# Altium PCB PlacaEj6.PcbDoc
Units mm, origin at the board's own origin, x right, y up, seen from the top; angles counter-clockwise.
Board outline 50 x 50 mm, 2 copper layers (Top Layer, Bottom Layer); 13 components, 17 nets, 72 pads, 14 vias.
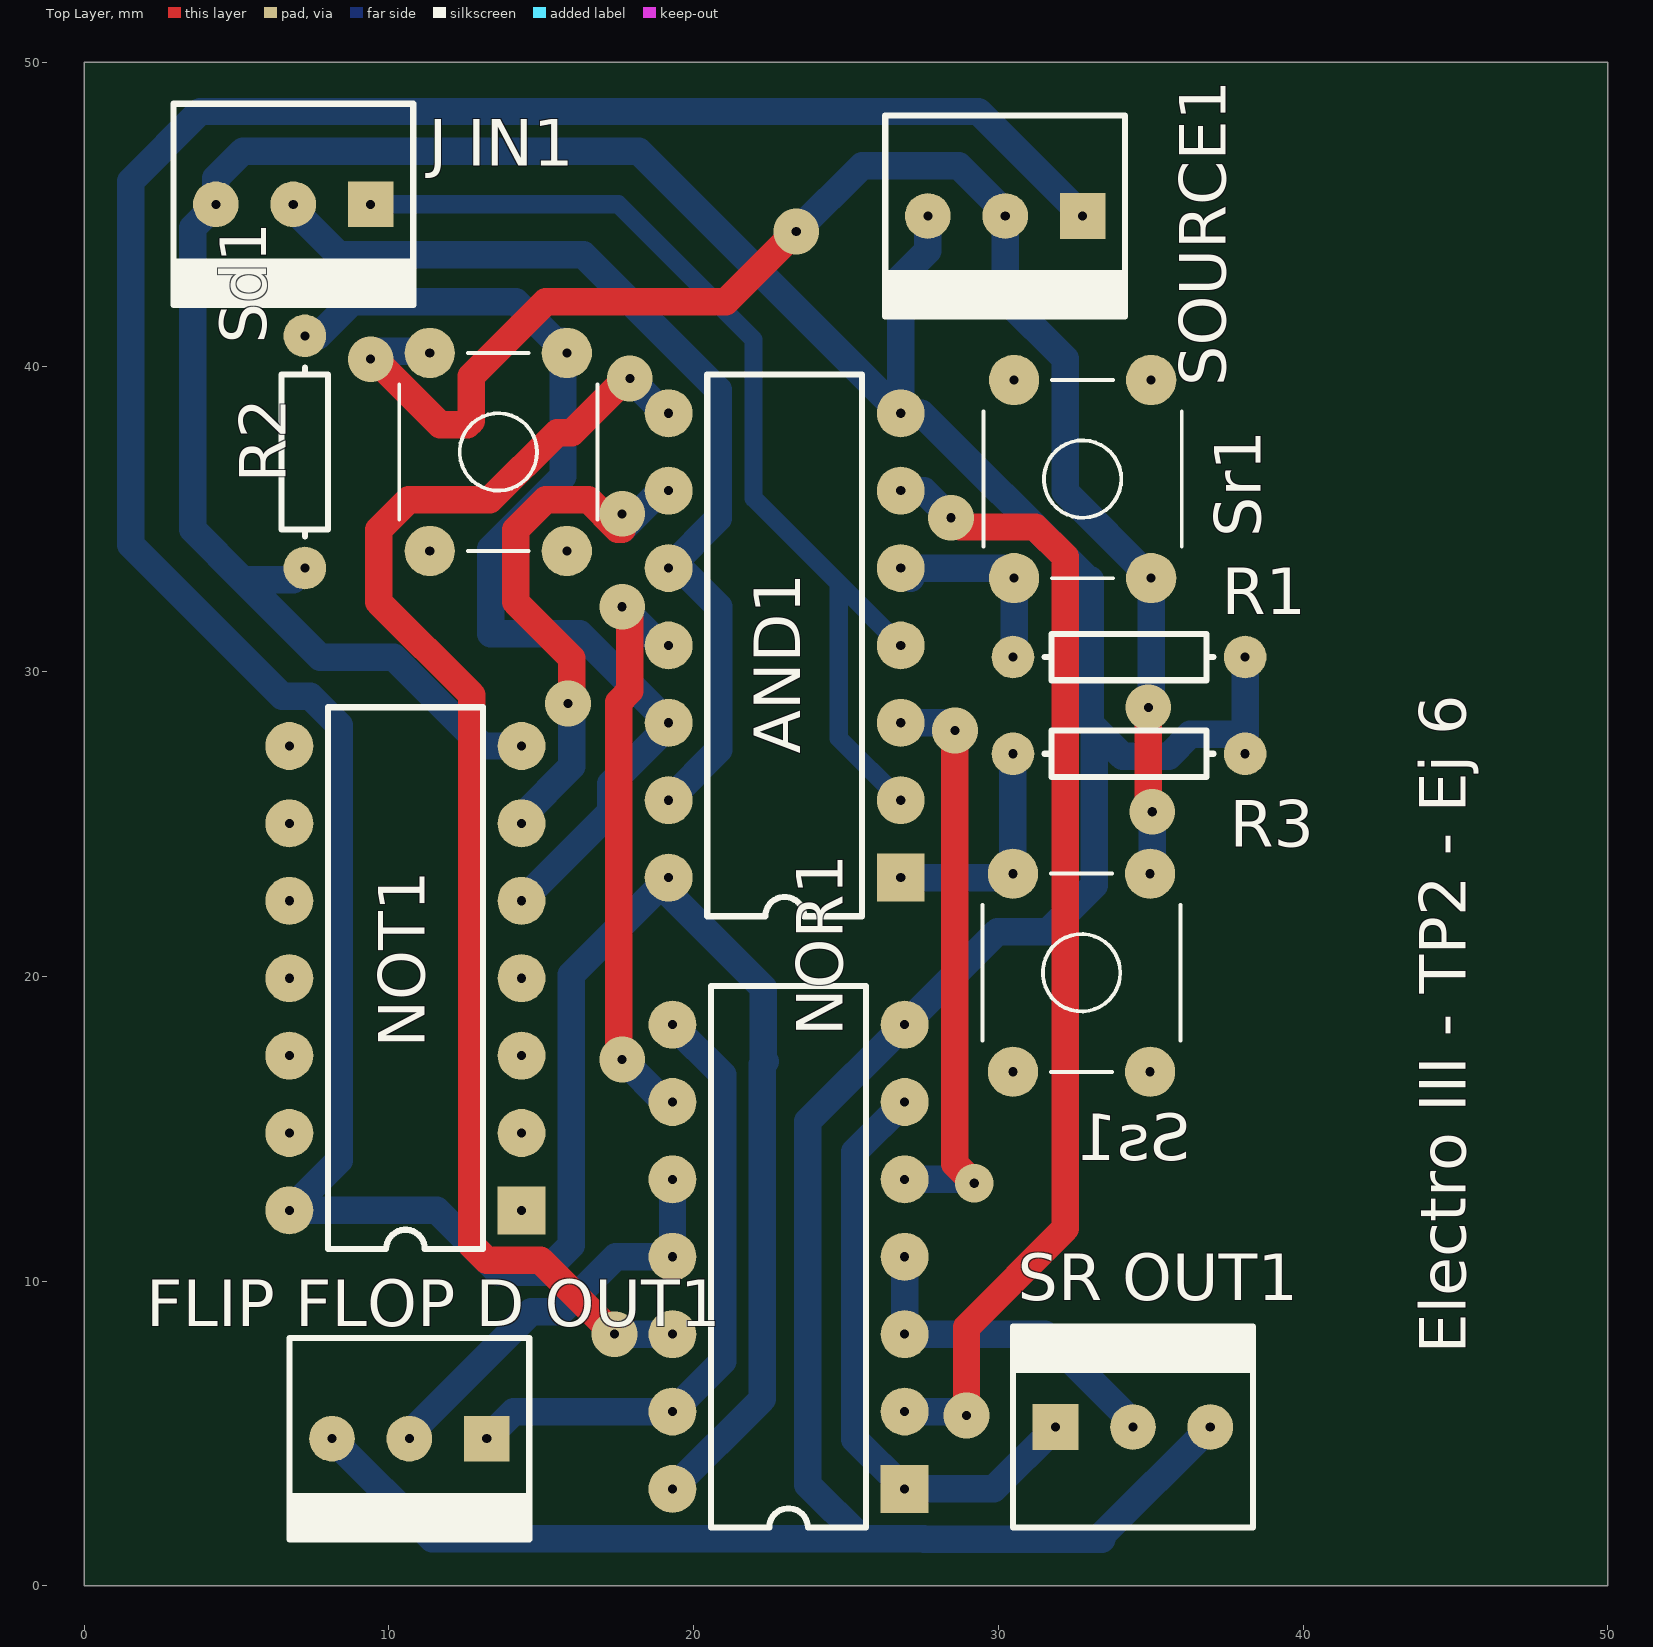
[diagram p0: Top Layer view]
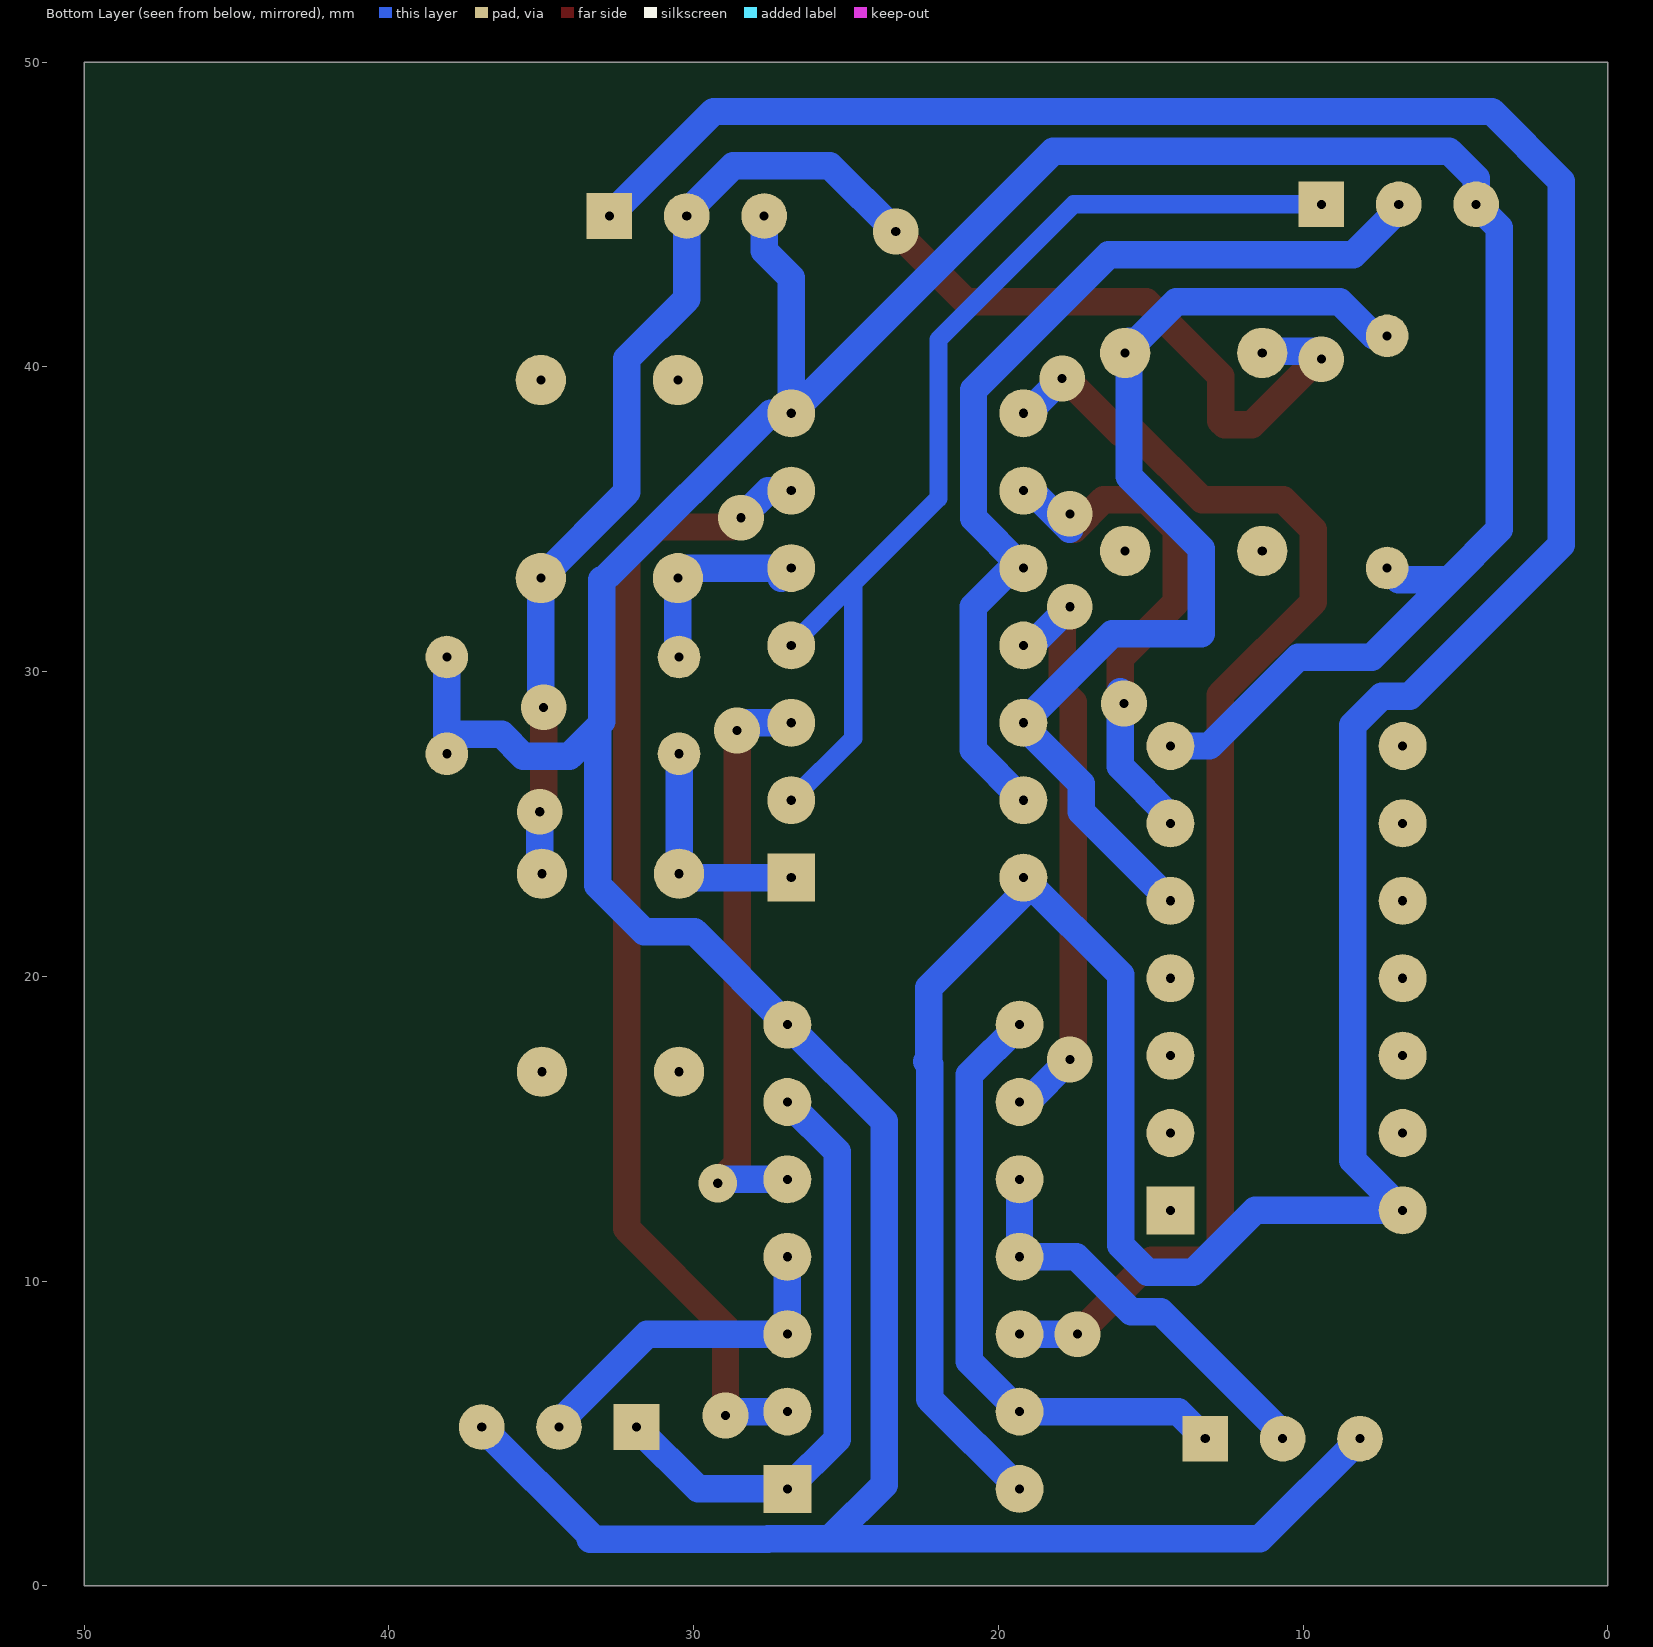
[diagram p1: Bottom Layer view, seen from below]
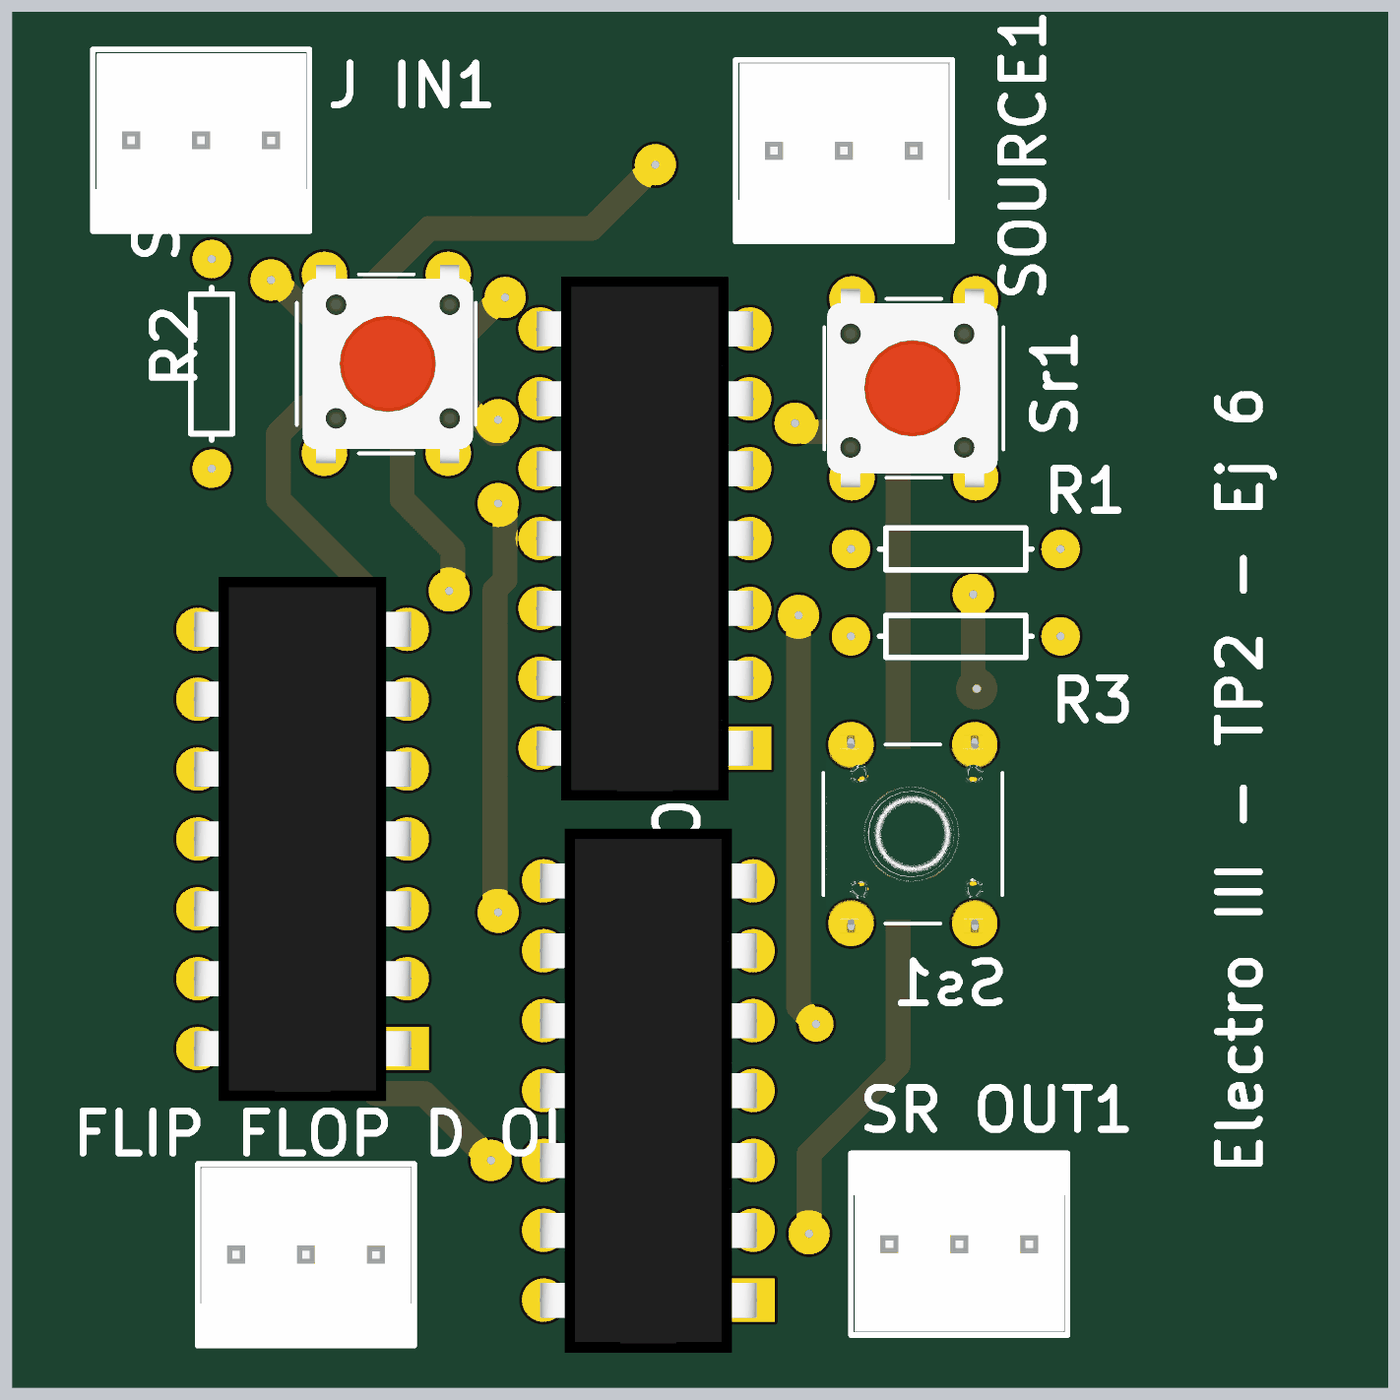
[diagram p2: 3D render of the assembled board from above, using the file's embedded part models]

## Layer stack, top to bottom
Top Solder: solder mask 0.0102, Solder Resist, Dk 3.5
Top Layer: signal copper 0.0356
Dielectric1: dielectric 0.32, FR-4, Dk 4.8
Bottom Layer: signal copper 0.0356
Bottom Solder: solder mask 0.0102, Solder Resist, Dk 3.5

## Board outline
0,0 50,0 50,50 0,50

## Design rules (kind name [scope] priority, off if disabled: settings)
Clearance [All] p1: gap=0.4 ignorepadtopadclearanceinfootprint=FALSE except(0: Arc-Hole Track-Hole SMDPad-Hole THPad-Hole Via-Hole Fill-Hole Poly-Hole Region-Hole Text-Hole)
PolygonConnect [All] p1: connectstyle=Relief reliefconductorwidth=0.254 reliefentries=4 polygonreliefangle="90 Angle" airgapwidth=0.254
RoutingVias [All] p1: holewidth=0.5 width=2 viastyle="Through Hole" minholewidth=0.3 minwidth=1.5 maxholewidth=0.5 maxwidth=2
SolderMaskExpansion [All] p1: expansion=0.102
Width [All] p1: maxlimit=0.9 minlimit=0.6 preferedwidth=0.9 minimp=50.000000 maximp=50.000000 favimp=50.000000
30 further rules are at their usual default settings.

## Components (designator, comment, footprint, x,y, rotation, side; value= is the part's Value field where it differs from the comment)
AND1 "HC08" DIP14 26.797,23.241 r180 top
"FLIP FLOP D OUT1" "MOLEX3" MOLEX3 13.208,4.826 r180 top
"J IN1" "MOLEX3" MOLEX3 9.398,45.339 r180 top
NOR1 "HC02" DIP14 26.924,3.175 r180 top
NOT1 "HC04" DIP14 14.351,12.319 r180 top
R1 "Res1" AXIAL-0.3 34.29,30.48 r180 top
R2 "Res1" AXIAL-0.3 7.239,37.211 r90 top
R3 "Res1" AXIAL-0.3 34.29,27.305 r180 top
Sd1 "TACT SWITCH" TACTSWITCH#1 13.589,37.211 r0 top
SOURCE1 "MOLEX3" MOLEX3 32.766,44.958 r180 top
Sr1 "TACT SWITCH" TACTSWITCH#1 32.766,36.322 r180 top
"SR OUT1" "MOLEX3" MOLEX3 31.877,5.207 r0 top
Ss1 "TACT SWITCH" TACTSWITCH#2 32.73,20.118 r180 top

## Footprints (in the part's own frame and the unit in brackets; to place one, negate y for a bottom-side part, rotate by r counter-clockwise, add the part's x,y. Pads: shape width x height; smd on the part's side, far side on the other; paste and mask are expansions set on the pad)
AXIAL-0.3 [mm] "Axial Device, Thru-Hole; 2 Leads; 0.3 in Pin Spacing"
  round 1.4 hole 0.3: 1(-3.81,0) 2(3.81,0)
  silkscreen extent -2.77,-0.76 2.77,0.76
DIP14 [mil]
  rect 62x62 hole 11.81: 1(0,0)
  round 62 hole 11.81: 2(0,-100) 3(0,-200) 4(0,-300) 5(0,-400) 6(0,-500) 7(0,-600) 8(300,-600) 9(300,-500) 10(300,-400) 11(300,-300) 12(300,-200) 13(300,-100) 14(300,0)
  silkscreen extent 50,-650 250,50, body extent -5,-675 305,75, height 165
MOLEX3 [mm]
  rect 1.5x1.5 hole 0.3: 1(0,0)
  round 1.5 hole 0.3: 2(2.54,0) 3(5.08,0)
  silkscreen extent -1.4,-3.3 6.48,3.3, body extent -1.27,-3.17 6.35,3.18, height 10.74
TACTSWITCH#1 [mm]
  round 1.651 hole 0.3: 1(-2.25,-3.25) 2(-2.25,3.25) 3(2.25,-3.25) 4(2.25,3.25)
  silkscreen extent -3.25,-3.25 3.25,3.25, body extent -3.05,-3.95 3.15,3.95, height 7
TACTSWITCH#2 [mm]
  round 1.651 hole 0.3: 1(-2.25,3.25) 2(-2.25,-3.25) 3(2.25,3.25) 4(2.25,-3.25)
  silkscreen extent -3.25,-3.25 3.25,3.25, body extent -3.05,-3.95 3.15,3.95, height 7

## Part data
AND1 NOR1 NOT1: library part IC_DIP14
R1 R2 R3: "Resistor"

## Via types
v1: diameter 1.5, hole 0.3, Top Layer to Bottom Layer, 12 vias
v2: diameter 1.27, hole 0.3, Top Layer to Bottom Layer, 1 vias
v3: diameter 1.5, hole 0.3, Top Layer to Bottom Layer, tented top, 1 vias

## Nets (pads, with @x,y where several pads share a name; then routed paths per layer and width w, separated by ;. In a path a pad name is that pad's centre, name@x,y a point inside that pad or via, vN(x,y) a via of type N, cw(c..) or ccw(c..) an arc to the next point about the centre after c; other vN are vias at no path point)
+VCC: AND1.14 NOR1.14 NOT1.14 SOURCE1.1 | length 117.9
  Bottom Layer w0.9: NOR1.14 22.255,6.126 22.255,17.108 22.352,17.205 22.288,17.269 22.288,19.621 19.177,22.733 AND1.14 15.988,20.052 15.988,11.18 15.096,10.287 13.606,10.287 11.574,12.319 NOT1.14 8.368,13.956 8.368,28.237 7.409,29.196 6.491,29.196 1.524,34.163 1.524,46.101 3.81,48.387 29.337,48.387 SOURCE1.1
CLK: "J IN1.2" AND1.10 AND1.13 | length 32.3
  Bottom Layer w0.9: 6.858,45.339 6.858,45.177 8.347,43.688 16.383,43.688 20.814,39.257 20.814,35.038 AND1.10 19.558,33.401 20.828,32.131 20.828,27.432 AND1.13
D: AND1.12 NOT1.5 R2.2 Sd1.4 | length 35.2
  Bottom Layer w0.9: R2.2 7.679,41.021 8.794,42.137 14.163,42.137 Sd1.4@15.712,40.588 ; NOT1.5 17.272,25.4 17.272,26.326 19.177,28.231 AND1.12 16.256,31.242 13.335,31.242 13.335,34.036 15.712,36.413 Sd1.4@15.712,40.588 ; Sd1.4@15.712,40.842 Sd1.4@15.712,40.588 ; Sd1.4 Sd1.4@15.712,40.588
D&Clk: AND1.11 NOR1.9 | length 19.4
  Top Layer w0.9: v1(17.653,17.272) 17.54,17.385 17.54,28.999 17.907,29.367 v1@17.907,32.004 ; NOR1.9@19.177,16.002 NOR1.9
  Bottom Layer w0.9: v1(17.653,17.272) 19.05,15.875 NOR1.9 ; v1(17.653,32.131) 18.923,30.861 AND1.11
E: "J IN1.1" AND1.2 AND1.4 | length 34.4
  Bottom Layer w0.6: 9.398,45.339 17.526,45.339 21.964,40.901 21.964,35.694 24.765,32.893 ; AND1.2 24.765,27.813 24.765,32.893 ; AND1.4 24.765,32.893
GND: "FLIP FLOP D OUT1.3" "J IN1.3" "SR OUT1.3" AND1.7 NOR1.7 NOT1.7 R1.1 R2.1 R3.1 SOURCE1.3 | length 145.3
  Bottom Layer w0.9: R2.1 6.858,33.02 5.207,33.02 ; 8.128,4.826 11.416,1.538 25.527,1.538 ; NOT1.7 13.081,27.559 10.16,30.48 7.747,30.48 5.207,33.02 ; AND1.7@27.477,38.481 32.766,33.192 ; SOURCE1.3 27.686,43.815 26.797,42.926 AND1.7 18.191,47.087 5.207,47.087 4.318,46.198 4.318,45.339 3.556,44.577 3.556,34.671 5.207,33.02 ; 33.02,28.367 33.02,33.02 ; 36.957,5.207 33.401,1.651 33.401,1.524 27.573,1.524 27.559,1.538 25.527,1.538 ; R1.1 38.1,27.94 36.299,27.94 35.588,27.229 34.075,27.229 33.147,28.157 33.147,22.987 31.623,21.463 29.972,21.463 NOR1.7 23.749,15.24 23.749,3.316 25.527,1.538
nD: AND1.9 NOT1.6 | length 17.7
  Top Layer w0.9: v1@16.002,29.337 16.002,30.447 14.163,32.285 14.163,34.655 15.145,35.636 16.549,35.636 17.515,34.671 v1@17.653,34.671
  Bottom Layer w0.9: NOT1.6 14.351,25.243 16.002,26.894 v1@16.002,29.337 ; v1@17.653,34.671 18.923,35.941 AND1.9 AND1.9@19.177,35.717
  other v1: 15.875,28.956 17.653,35.179
nD&Clk: AND1.8 NOR1.12 | length 44.7
  Top Layer w0.9: v1(17.399,8.255) 14.972,10.682 13.212,10.682 12.714,11.18 12.714,29.235 9.663,32.285 9.663,34.655 10.645,35.636 13.307,35.636 15.516,37.846 16.002,37.846 v1@17.674,39.518 ; AND1.8 AND1.8@19.304,38.354
  Bottom Layer w0.9: v1(17.399,8.255) NOR1.12 ; v1(17.907,39.624) 19.05,38.481 AND1.8 AND1.8@19.05,38.608
nQd: "FLIP FLOP D OUT1.2" NOR1.10 NOR1.11 | length 13.7
  Bottom Layer w0.9: 10.668,4.826 10.668,4.988 14.667,8.987 15.634,8.987 17.442,10.795 NOR1.11 NOR1.10
nQrs: "SR OUT1.2" NOR1.3 NOR1.4 | length 11.4
  Bottom Layer w0.9: NOR1.4 NOR1.3 31.531,8.255 34.417,5.369 34.417,5.207
Qd: "FLIP FLOP D OUT1.1" NOR1.8 NOR1.13 | length 20.5
  Bottom Layer w0.9: 13.208,4.826 14.097,5.715 NOR1.13 20.955,7.366 20.955,16.764 NOR1.8
Qrs: "SR OUT1.1" NOR1.1 NOR1.6 | length 19.9
  Bottom Layer w0.9: NOR1.6 25.287,14.238 25.287,4.812 NOR1.1 29.845,3.175 31.877,5.207
R: AND1.5 R1.2 Sr1.4 | length 6.9
  Bottom Layer w0.9: AND1.5@27.126,33.072 AND1.5 30.187,33.401 Sr1.4 30.516,30.516 R1.2
R&E: AND1.6 NOR1.2 | length 37.9
  Top Layer w0.9: v1(28.448,35.052) 28.753,34.747 31.21,34.747 32.192,33.766 32.192,11.723 28.956,8.487 v1(28.956,5.588)
  Bottom Layer w0.9: AND1.6 27.559,35.941 v1(28.448,35.052) ; NOR1.2 28.829,5.715 v1(28.956,5.588)
S: AND1.1 R3.2 Ss1.4 | length 7.7
  Bottom Layer w0.9: AND1.1@26.797,23.467 AND1.1 Ss1.4@30.353,23.241 ; Ss1.4 R3.2
S&E: AND1.3 NOR1.5 | length 19.5
  Top Layer w0.9: AND1.3 AND1.3@26.924,28.194 ; v1(28.575,28.067) 28.575,13.843 v2(29.21,13.208)
  Bottom Layer w0.9: AND1.3 28.321,28.321 v1(28.575,28.067) ; NOR1.5 29.083,13.335 v2(29.21,13.208)
SWIN: Sd1.2 SOURCE1.2 Sr1.2 Ss1.2 | length 52.9
  Top Layer w0.9: v1@9.271,40.513 11.684,38.1 12.573,38.1 12.7,38.227 12.7,39.692 15.145,42.137 21.055,42.137 v1(23.368,44.45) ; v1(34.925,28.829) 34.925,25.527 v3(35.052,25.4)
  Bottom Layer w0.9: v1@9.271,40.513 11.287,40.513 Sd1.2 ; v1(23.368,44.45) 25.527,46.609 28.702,46.609 30.226,45.085 SOURCE1.2 30.226,42.232 32.192,40.266 32.192,35.896 Sr1.2 35.016,28.92 v1(34.925,28.829) ; Ss1.2 35.052,23.44 v3(35.052,25.4)
  other v1: 9.398,40.259
pads on no net: NOT1.1 NOT1.2 NOT1.3 NOT1.4 NOT1.8 NOT1.9 NOT1.10 NOT1.11 NOT1.12 NOT1.13 Sd1.1 Sd1.3 Sr1.1 Sr1.3 Ss1.1 Ss1.3
copper on no net: | length 0.2
  Bottom Layer w0.9: 11.303,34.163 11.303,33.997 11.339,33.961

## Silkscreen, mask and mechanical layers (free items; w line width, h text height)
Top Overlay:
  text "Electro III - TP2 - Ej 6" at 45.339,7.62 h1.52 r90